# Altium PCB Motor-57.PcbDoc
Units mil, origin at the board's own origin, x right, y up, seen from the top; angles counter-clockwise.
Board outline 2220.47 x 2220.47 mil, 4 copper layers (Top1, Signal2, Gnd3, Bottom4), stack 30.634 mil thick; 67 components, 62 nets, 255 pads, 285 vias.
Unrouted connection lines stored in the file: 54.
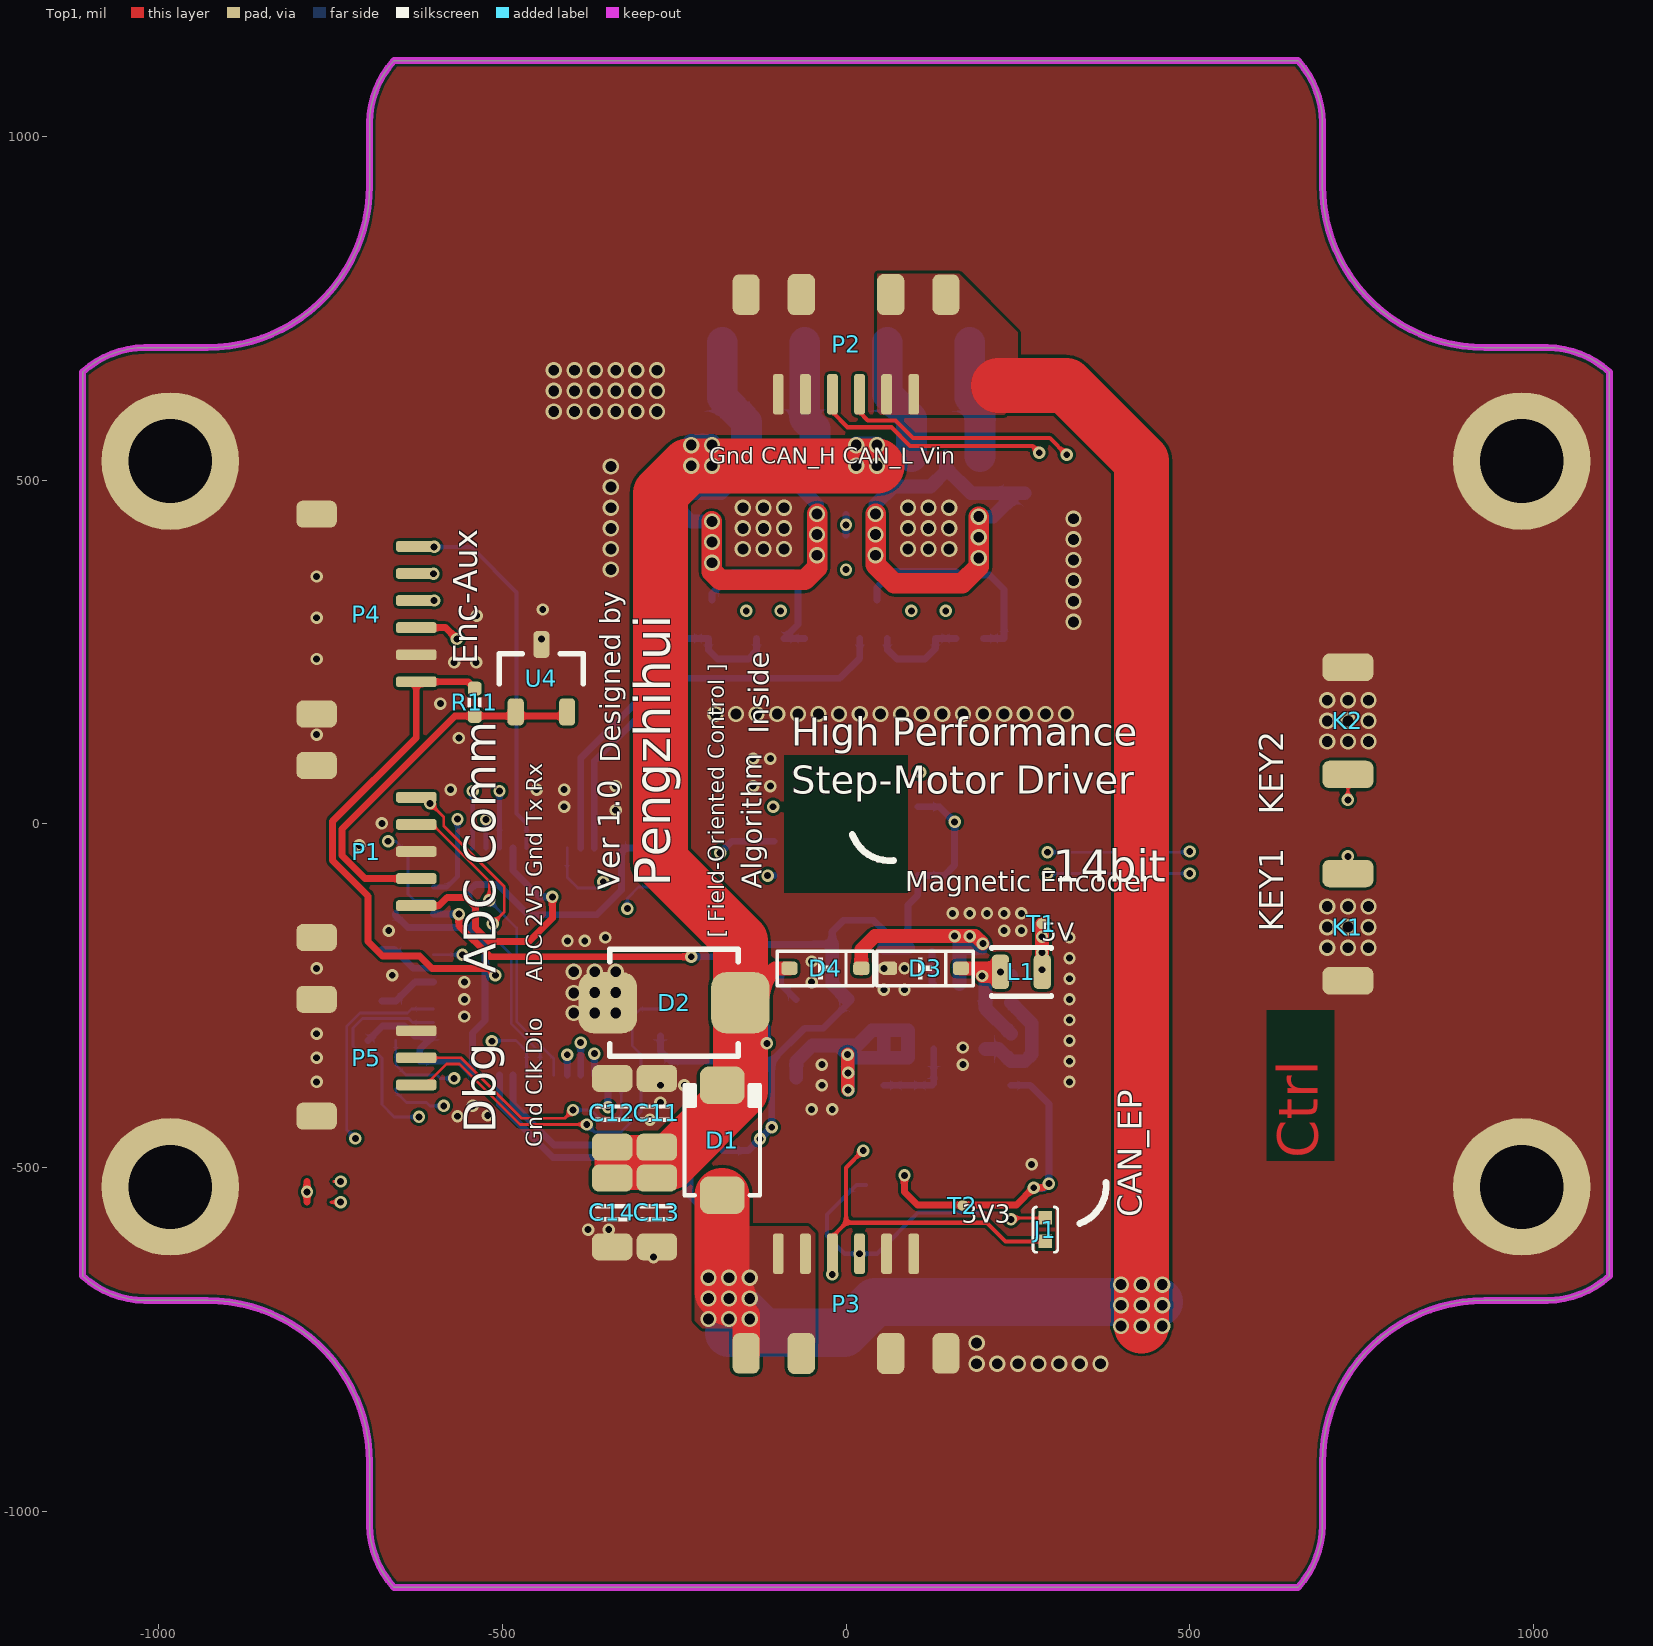
[diagram p0: Top1 view]
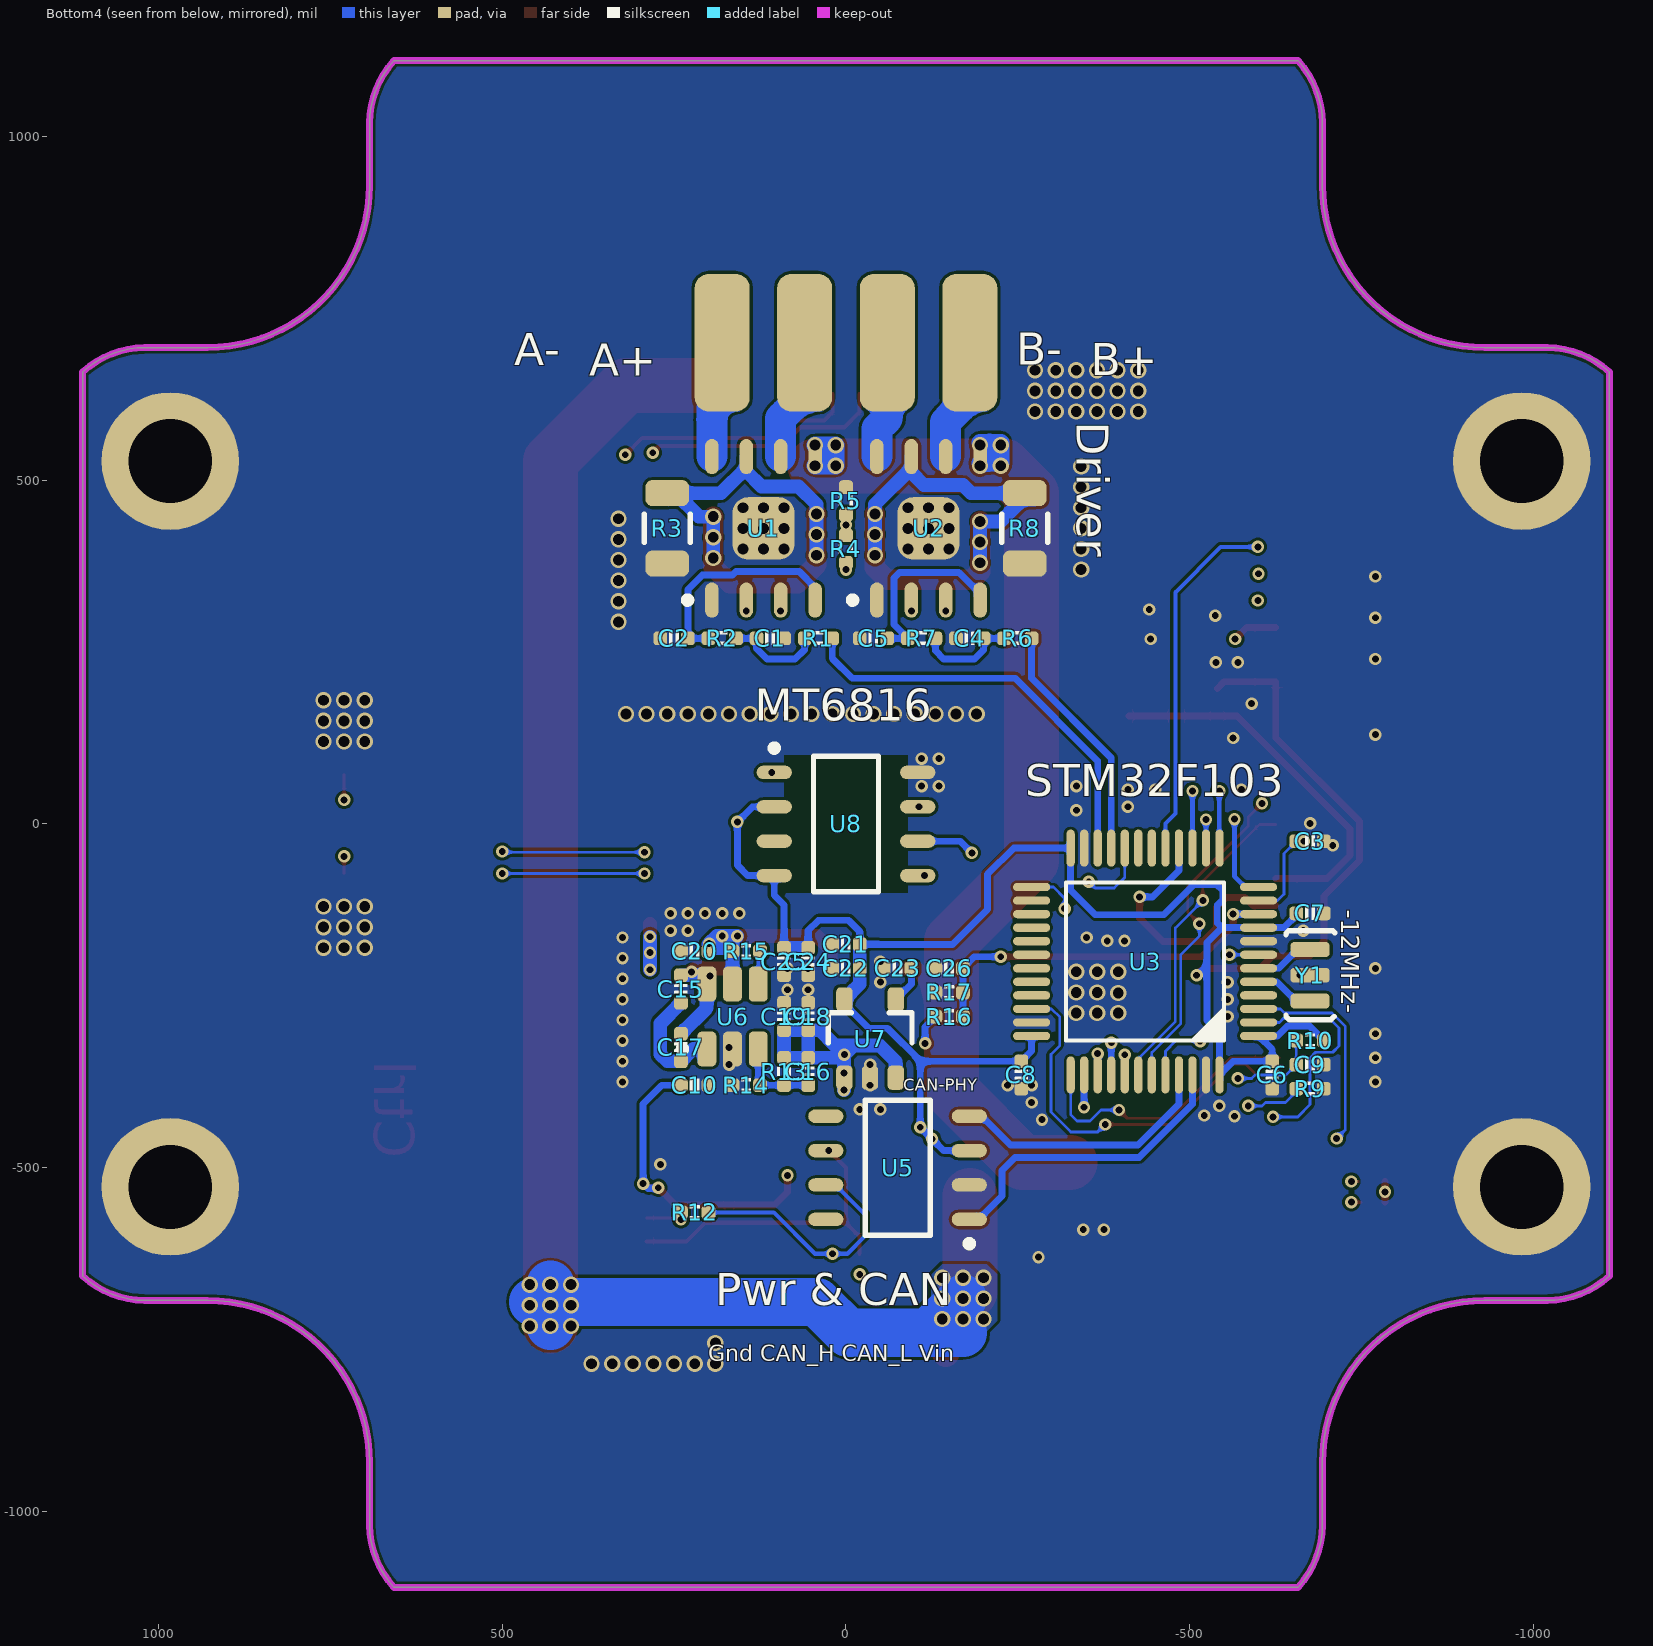
[diagram p1: Bottom4 view, seen from below]
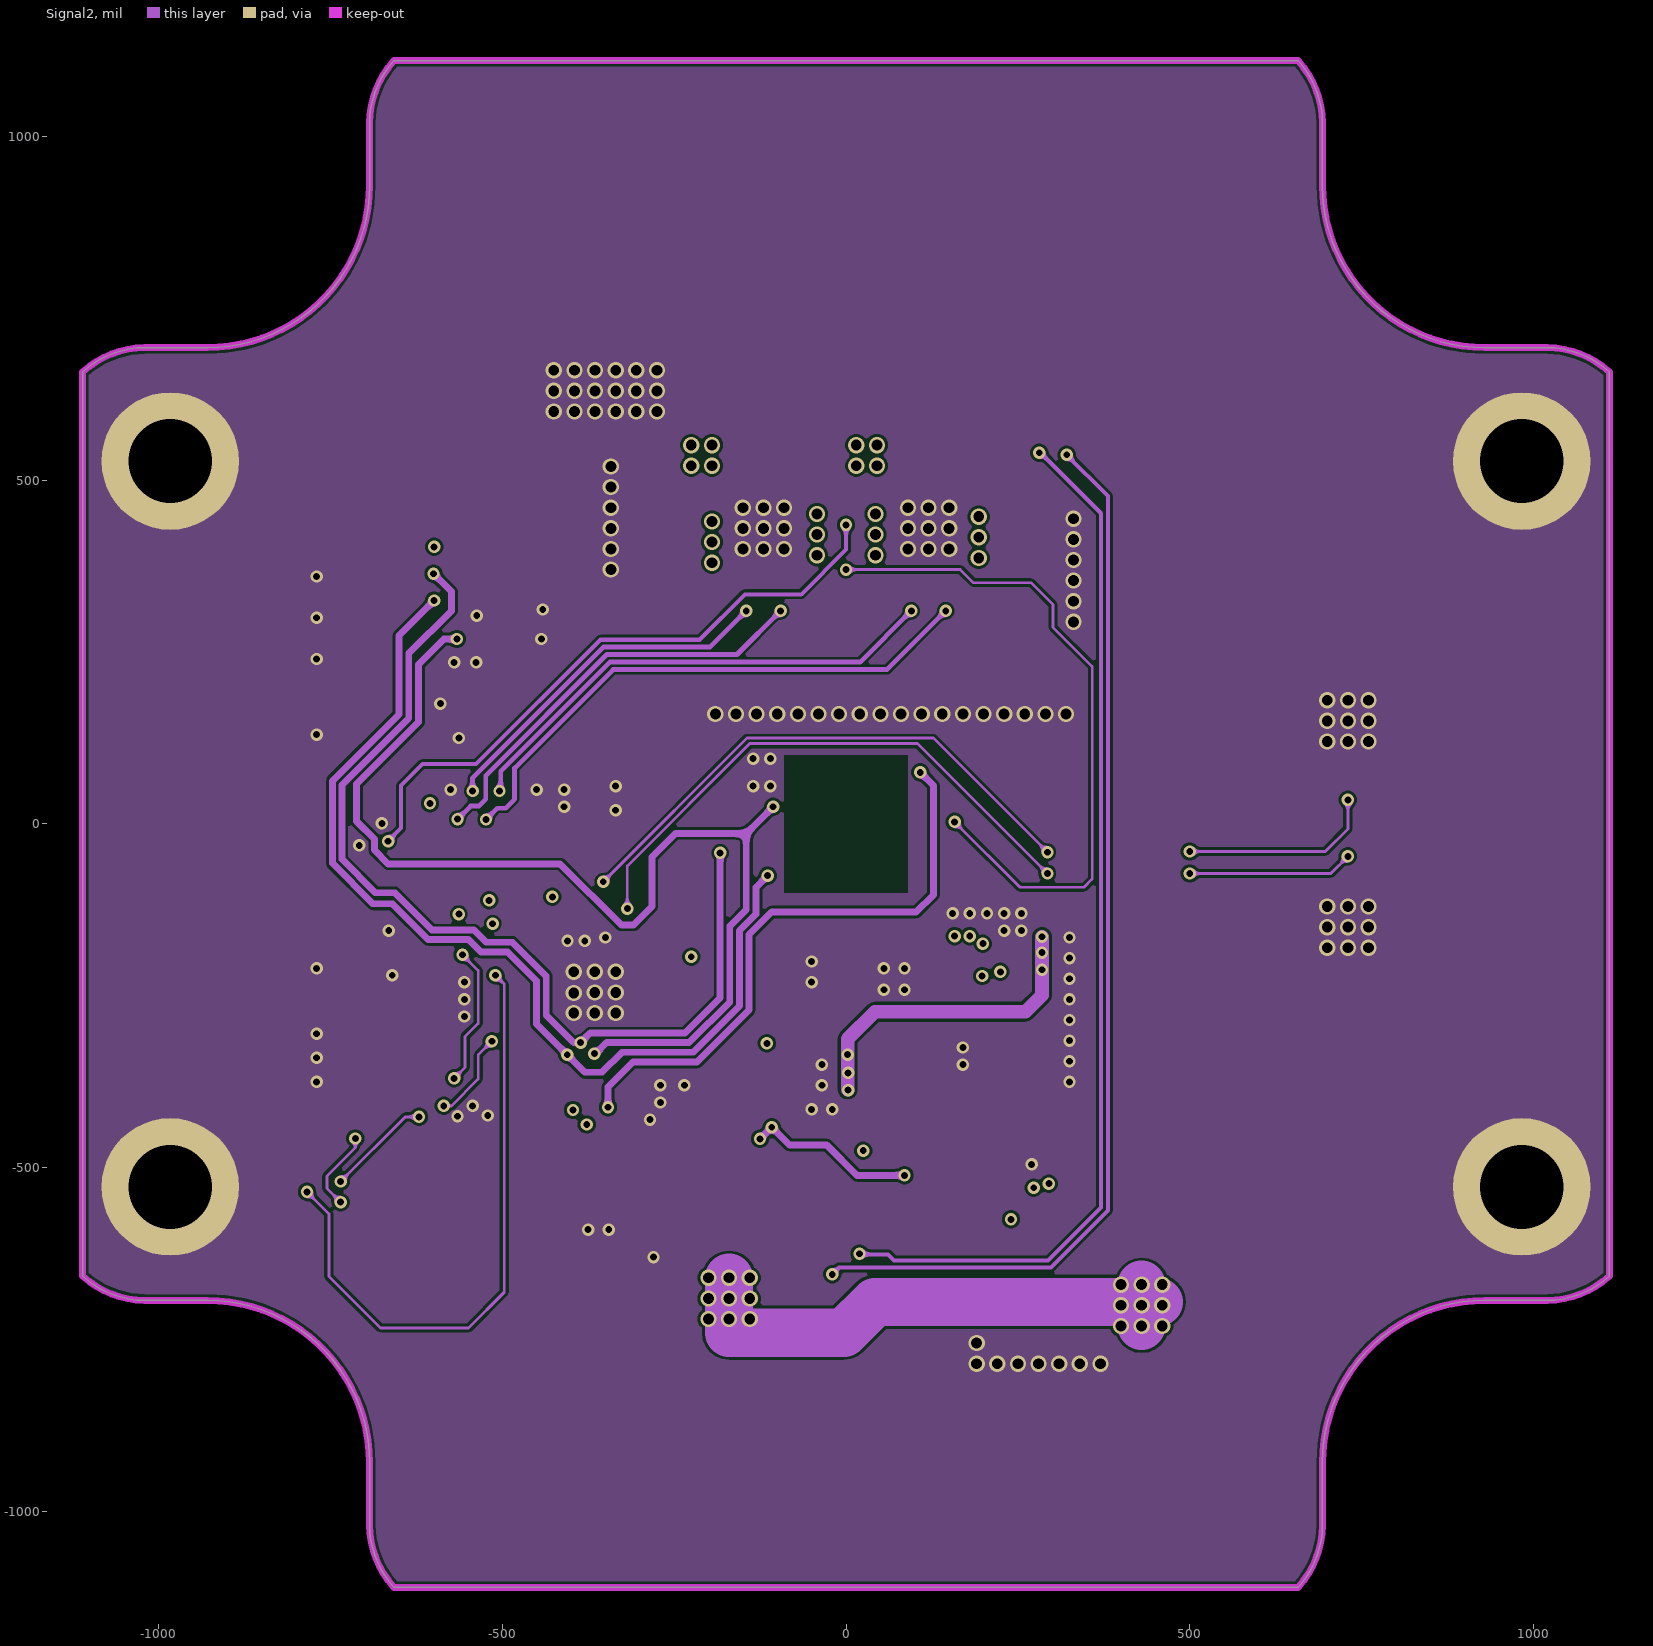
[diagram p2: Signal2]
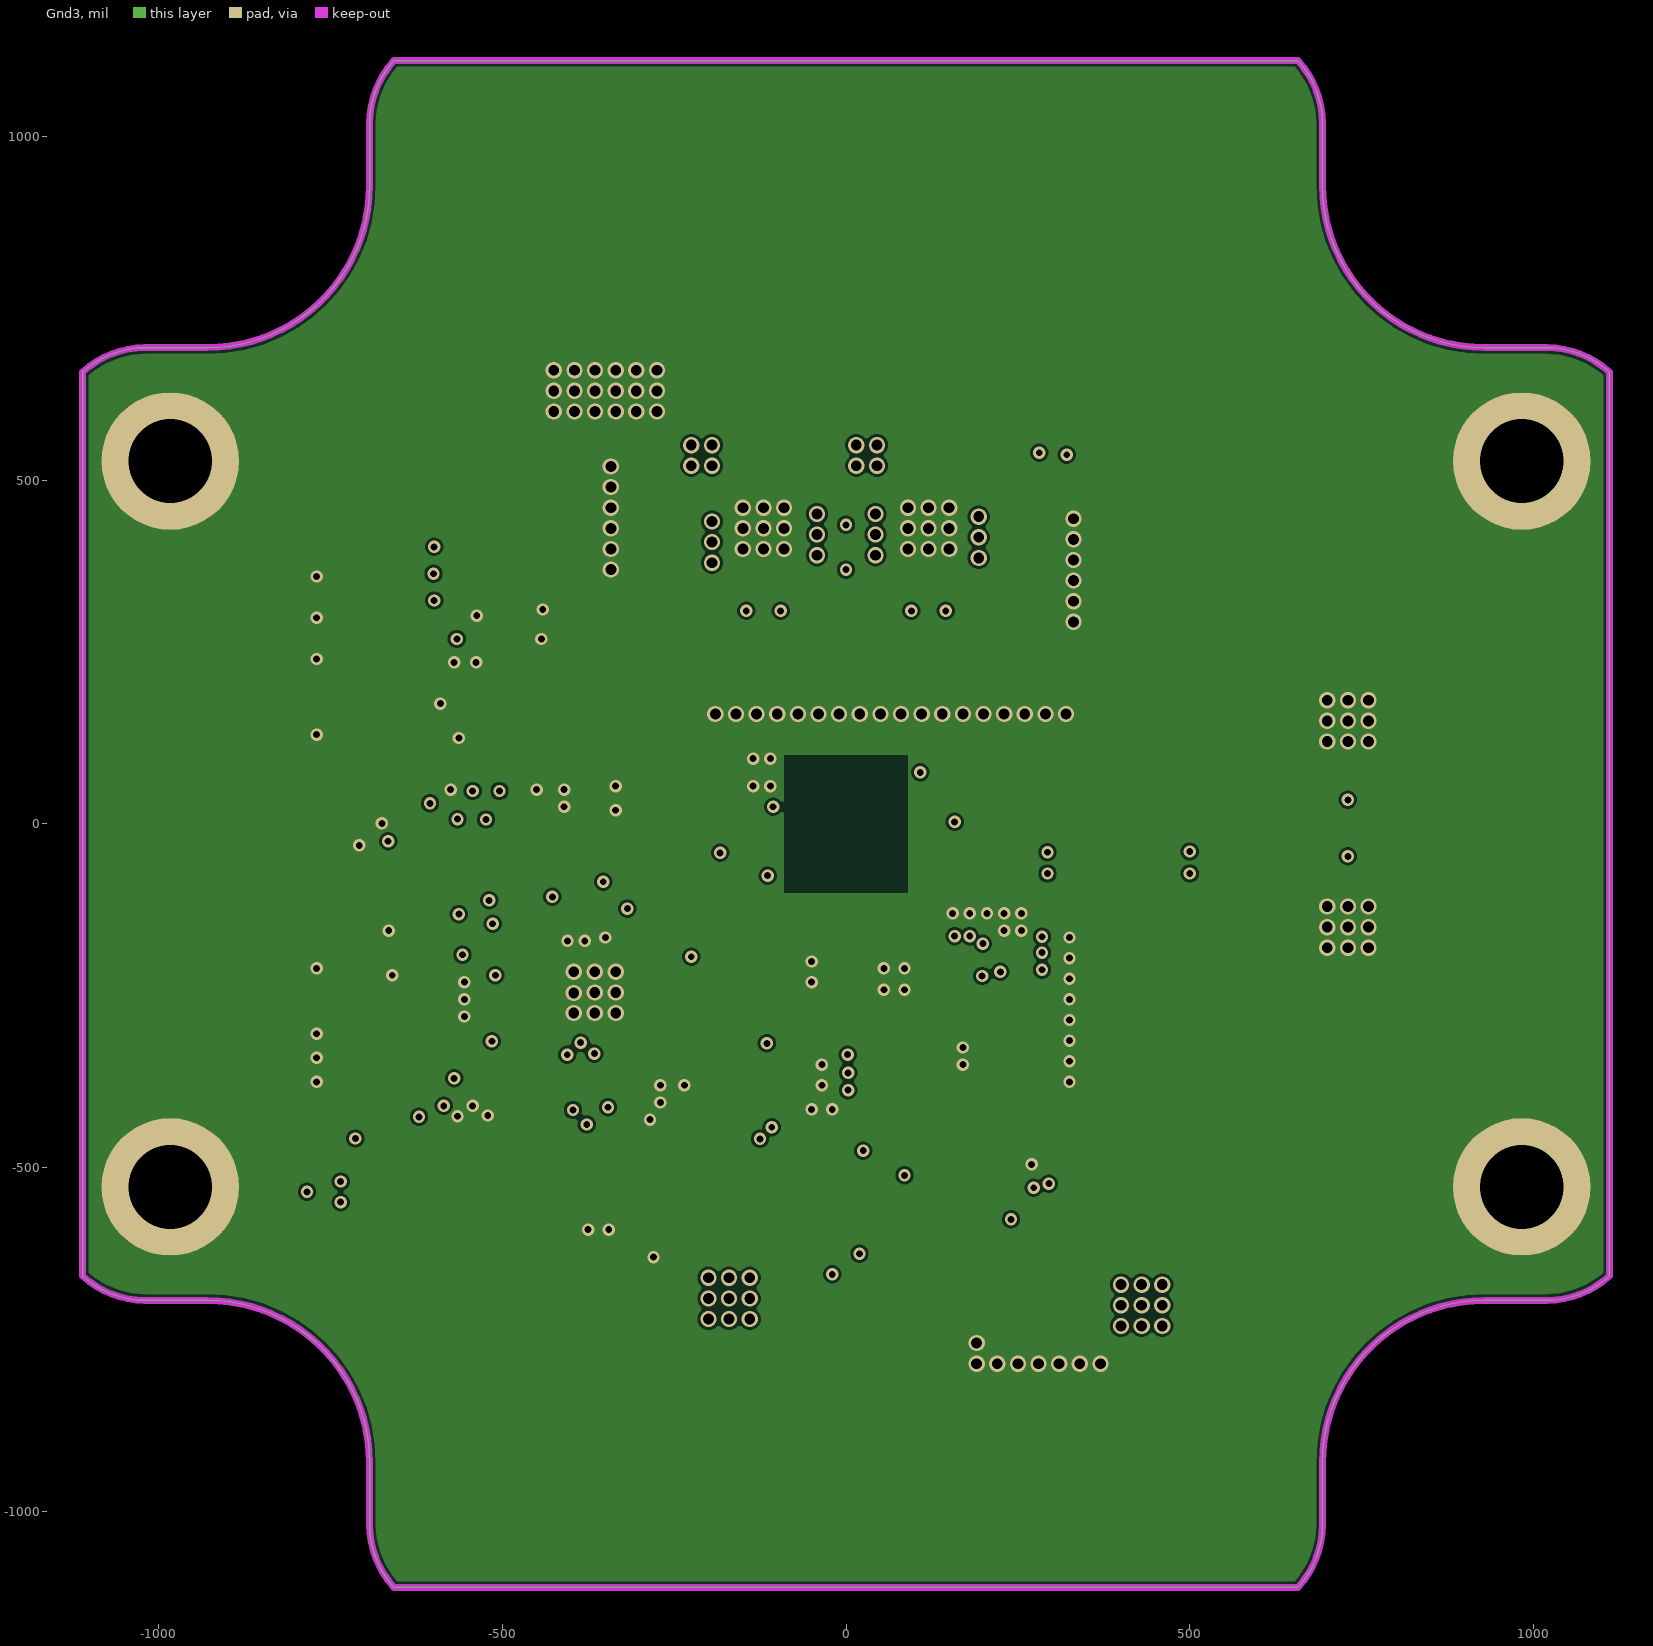
[diagram p3: Gnd3]
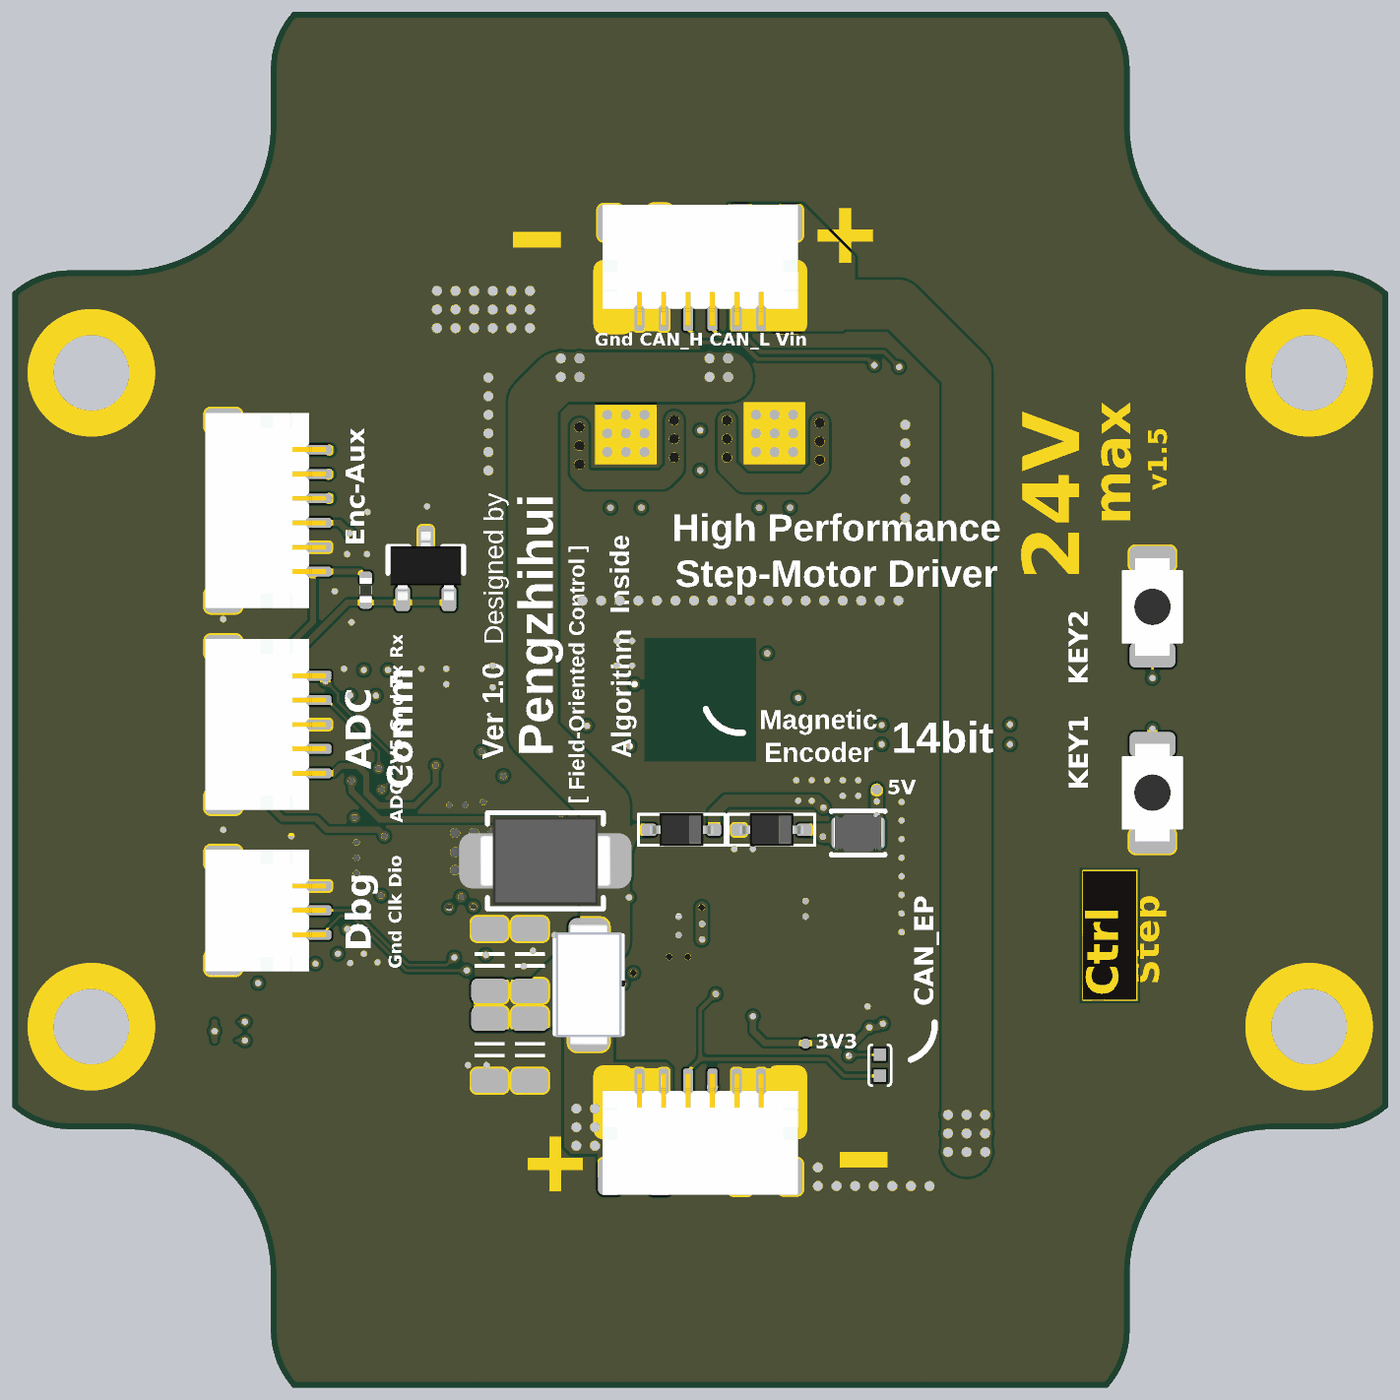
[diagram p4: 3D render of the assembled board from above, using the file's embedded part models]
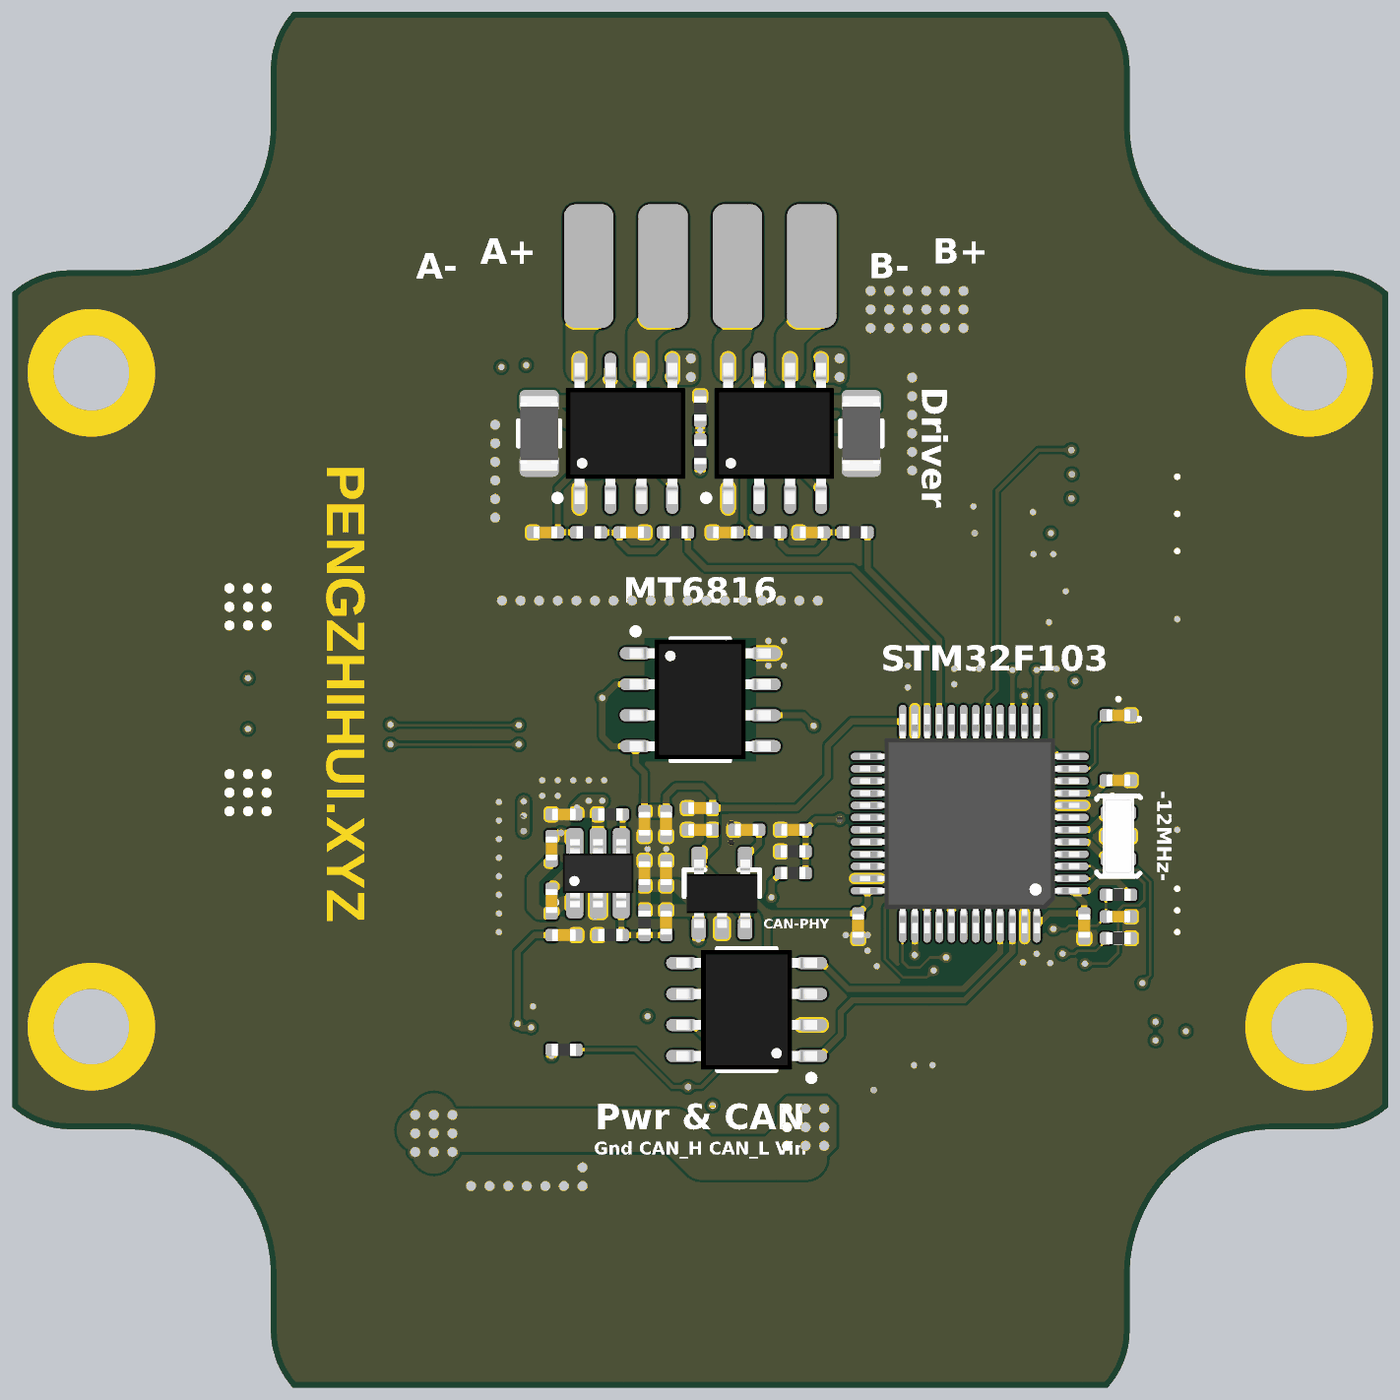
[diagram p5: 3D render of the assembled board from below, using the file's embedded part models]

## Layer stack, top to bottom
Top Solder: solder mask 0.4, Solder Resist, Dk 3.5
Top1: signal copper 1.4
Dielectric1: core 10, FR-4, Dk 4.2
Signal2: signal copper 1.417
Dielectric2: core 10, Dk 4.2
Gnd3: signal copper 1.417
Dielectric3: prepreg 5, Dk 4.2
Bottom4: signal copper 1.4
Bottom Solder: solder mask 0.4, Solder Resist, Dk 3.5

## Board outline
-1019.97,-693 -928.63,-693 cw(c-928.63,-928.63) -693,-928.63 -693,-1019.97 ccw(c-556,-1018.18) -657.48,-1110.24 657.48,-1110.24 ccw(c556.01,-1018.18) 693,-1019.97 693,-928.63 cw(c928.63,-928.63) 928.63,-693 1019.97,-693 ccw(c1018.18,-556) 1110.24,-657.48 1110.24,657.48 ccw(c1018.18,556.01) 1019.97,693 928.63,693 cw(c928.63,928.63) 693,928.63 693,1019.97 ccw(c556.01,1018.18) 657.48,1110.24 -657.48,1110.24 ccw(c-556.01,1018.18) -693,1019.97 -693,928.63 cw(c-928.63,928.63) -928.63,693 -1019.97,693 ccw(c-1018.18,556) -1110.24,657.48 -1110.24,-657.48 ccw(c-1018.18,-556)

## Design rules (kind name [scope] priority, off if disabled: settings)
Clearance [All] p1: gap=4 ignorepadtopadclearanceinfootprint=FALSE except(0: Arc-Hole Track-Hole SMDPad-Hole THPad-Hole Via-Hole Fill-Hole Poly-Hole Region-Hole Text-Hole)
ComponentClearance [All] p1: gap=0 collisioncheckmode=3 verticalgap=0 showdistances=FALSE
DiffPairsRouting [All] p1: maxlimit=9 minlimit=9 mostfreqgap=9 toplayer_minwidth=15 toplayer_maxwidth=15 toplayer_prefwidth=15 midlayer1_minwidth=15 midlayer1_maxwidth=15 midlayer1_prefwidth=15 midlayer2_minwidth=15 midlayer2_maxwidth=15 midlayer2_prefwidth=15 bottomlayer_minwidth=15 bottomlayer_maxwidth=15 bottomlayer_prefwidth=15 maxuncoupledlength=500
FanoutControl Fanout_BGA [All] p1: bgadir=Out bgaviamode=Centered fanoutstyle=Auto fanoutdirection=Alternating viagrid=1 // Fanout_BGA (Default Rule)
HoleSize [All] p1: absolutevalues=TRUE maxlimit=10000 minlimit=8 maxpercent=80.000 minpercent=20.000
MinimumSolderMaskSliver [All] p1 off: minsoldermaskwidth=2
PlaneClearance [All] p1: clearance=8
PlaneConnect [All] p1: planeconnectstyle=Direct reliefexpansion=20 reliefentries=4 reliefconductorwidth=10 reliefairgap=10
PolygonConnect [All] p1: connectstyle=Direct reliefconductorwidth=10 reliefentries=4 polygonreliefangle="90 Angle" airgapwidth=10
RoutingVias [All] p1: holewidth=8 width=16 viastyle="Through Hole" minholewidth=6 minwidth=12 maxholewidth=28 maxwidth=50
SilkToSilkClearance [All] p1: silktosilkclearance=0
SilkToSolderMaskClearance [IsPad] p1: minsilkscreentomaskgap=0 clearancetoexposedcopper=TRUE
SolderMaskExpansion [All] p1: expansion=3 istentingtop=FALSE
Width GND [(InNet('AGND') OR InNet('GND'))] p1: maxlimit=50 minlimit=4 preferedwidth=10
Width VCC [(InNet('VDD_SYS_3.3V') OR InNet('VDD_AV_3.3V') OR InNet('VDD_5V') OR InNet('VDD1V2-SYS') OR InNet('VDD1V1-EPHY') OR InNet('VDD-CPUX') OR InNet('VDD-CPUS') OR InNet('VDD-CPUFB') OR InNet('VCC-DRAM'))] p2: maxlimit=50 minlimit=4 preferedwidth=10
Width [All] p3: maxlimit=10000 minlimit=4 preferedwidth=4
21 further rules are at their usual default settings.

## Classes and differential pairs
component class Port: C10 J1 K1 K2 P1 P2 P3 P4 P5 U4 U5
component class MCU: C6 C7 C8 C9 R9 R10 U3 Y1
component class Interface: C24 C25 C26 R16 R17 U8
component class Drive: C1 C2 C3 C4 C5 R1 R2 R3 R4 R5 R6 R7 R8 U1 U2
component class Power: C11 C12 C13 C14 C15 C16 C17 C18 C19 C20 C21 C22 C23 D1 D2 D3 D4 L1 R13 R15 T1 T2 U6 U7

## Components (designator, comment, footprint, x,y, rotation, side; value= is the part's Value field where it differs from the comment)
C1 "0.1uF" CAP_0402 110,270 r0 bottom value=0.1u
C2 "0.1uF" CAP_0402 250,270 r180 bottom value=0.1u
C3 "10uF" CAP_0402 -675,-25 r0 bottom value=0.1u
C4 "0.1uF" CAP_0402 -180,270 r180 bottom value=0.1u
C5 "0.1uF" CAP_0402 -40,270 r180 bottom value=0.1u
C6 "0.1uF" CAP_0402 -620,-365 r90 bottom value=0.1u
C7 "0.1uF" CAP_0402 -675,-130 r0 bottom value=0.1u
C8 "0.1uF" CAP_0402 -255,-365 r90 bottom value=0.1u
C9 "0.1uF" CAP_0402 -675,-350 r0 bottom value=0.1u
C10 "10uF" CAP_0402 220,-380 r0 bottom value=0.1u
C11 "100uF" 1206-CAP -275,-420 r270 top value=0.1u
C12 "100uF" 1206-CAP -340,-420 r270 top value=0.1u
C13 "100uF" 1206-CAP -275,-565 r90 top value=0.1u
C14 "100uF" 1206-CAP -340,-565 r90 top value=0.1u
C15 "0.1uF" CAP_0402 240,-240 r270 bottom value=0.1u
C16 "100pF" CAP_0402 55,-360 r270 bottom value=0.1u
C17 "0.1uF" CAP_0402 240,-325 r270 bottom value=0.1u
C18 "0.1uF" CAP_0402 55,-280 r270 bottom value=0.1u
C19 "10uF" CAP_0402 90,-280 r270 bottom value=0.1u
C20 "10uF/50V" CAP_0402 220,-185 r180 bottom value=0.1u
C21 "0.1uF" CAP_0402 0,-175 r180 bottom value=0.1u
C22 "10uF" CAP_0402 0,-210 r180 bottom value=0.1u
C23 "10nF" CAP_0402 -75,-210 r180 bottom value=0.1u
C24 "10uF" CAP_0402 55,-200 r90 bottom value=0.1u
C25 "0.1uF" CAP_0402 90,-200 r90 bottom value=0.1u
C26 "0.1uF" CAP_0402 -150,-210 r180 bottom value=0.1u
D1 "SS54" DO-214AC -180,-460 r90 top
D2 "SMBJ28CA" SMBJ-CA_MFG -250,-260 r0 top
D3 "二极管-5819W" SOD-323 115,-210 r0 top
D4 "二极管-5819W" SOD-323 -30,-210 r0 top
J1 "跳线" 0402-0R 290,-590 r270 top
K1 "TACT 2P" ButtonTACT_3x4x2_180 730,-150 r90 top value=3x4
K2 "TACT 2P" ButtonTACT_3x4x2_180 730,150 r270 top value=3x4
L1 "6.8uH" IND-201612 255,-215 r0 top
P1 "SH1.0-5P" SH1.0-5P -625,-40 r270 top
P2 "SH1.0-6P" SH1.0-6P 0,625 r180 top
P3 "SH1.0-6P" SH1.0-6P 0,-625 r0 top
P4 "SH1.0-6P" SH1.0-6P -625,305.32 r270 top
P5 "SH1.0-3P" SH1.0-3P -625,-340 r270 top
R1 "1K" RES_0402 40,270 r0 bottom value=22R
R2 "1K" RES_0402 180,270 r0 bottom value=22R
R3 "0.1R" 1206-RES 260,430 r270 bottom value=22R
R4 "NCP15XH103F03RC" RES_0402 0,400 r270 bottom value=10k
R5 "3.3K" RES_0402 0,470 r270 bottom value=22R
R6 "1K" RES_0402 -250,270 r0 bottom value=22R
R7 "1K" RES_0402 -110,270 r0 bottom value=22R
R8 "0.1R" 1206-RES -260,430 r270 bottom value=22R
R9 "10K" RES_0402 -675,-385 r180 bottom value=22R
R10 "10K" RES_0402 -675,-315 r180 bottom value=22R
R11 "120R" RES_0402 -540,177 r270 top value=22R
R12 "120R" RES_0402 220,-565 r0 bottom value=22R
R13 "10K" RES_0402 90,-360 r90 bottom value=22R
R14 "1.8K" RES_0402 145,-380 r180 bottom value=22R
R15 "1M" RES_0402 145,-185 r180 bottom value=22R
R16 "10K" RES_0402 -150,-280 r180 bottom value=22R
R17 "1K" RES_0402 -150,-245 r0 bottom value=22R
T1 "测试点" TEST_PT 285,-145 r180 top
T2 "测试点" TEST_PT 170,-554.99 r180 top
U1 "TB67H450FNG" SO-8-PAD 120,430 r90 bottom locked
U2 "TB67H450FNG" SO-8-PAD -120,430 r90 bottom locked
U3 "STM32F103CBT6" LQFP-48 -435,-200 r0 bottom locked
U4 "TL431IDBZT" SOT23-3 -443,212 r90 top
U5 "SN65HVD232D" SO-8 -75,-500 r0 bottom
U6 "ME3116" SOT23-6 165,-280 r90 bottom
U7 "LP2992 3V3" SOT23-5 -35,-310 r90 bottom
U8 "MT6816" SO-8 0,0 r180 bottom
Y1 "12MHz" 晶振-3P -675,-220 r270 bottom

## Footprints (in the part's own frame and the unit in brackets; to place one, negate y for a bottom-side part, rotate by r counter-clockwise, add the part's x,y. Pads: shape width x height; smd on the part's side, far side on the other; paste and mask are expansions set on the pad)
0402-0R [mm] "选择焊盘"
  rect 0.5x0.5 smd: 1(-0.432,0) 2(0.432,0)
  silkscreen extent -0.84,-0.46 0.84,0.46
1206-CAP [mm]
  rrect50% 1x1.5 smd: 1(-1.27,0) 2(1.27,0)
  silkscreen extent -0.3,-0.61 0.3,0.61, body extent -1.5,-0.75 1.5,0.75, height 1.5
1206-RES [mil]
  rrect50% 37.64x63.38 smd paste+0 mask+0: 1(-51.22,0) 2(51.22,0)
  silkscreen extent -21,-33 21,33, body extent -61,-31 61,31, height 26
ButtonTACT_3x4x2_180 [mil]
  rrect50% 40x74 smd: 1(-78,0) 2(78,0)
  body extent -79,-49 79,49, height 63
CAP_0402 [mil]
  rrect50% 20x20 smd: 1(-20,0) 2(20,0)
  silkscreen extent -6,-9 6,9, body extent -20,-10 20,10, height 20
DO-214AC [mil] "SMA"
  rrect50% 55x65 smd: 1(-80,0) 2(80,0)
  silkscreen extent -80,-55 80,55, body extent -98,-53 98,53, height 85
IND-201612 [mil]
  rrect50% 25x50 smd paste+0 mask+0: 1(-30.46,0) 2(30.46,0)
  silkscreen extent -43,-35 43,35, body extent -39,-31 39,32, height 37
LQFP-48 [mil]
  oval 54x12 smd: 1(-165,108.27) 2(-165,88.58) 3(-165,68.9) 4(-165,49.21) 5(-165,29.53) 6(-165,9.84) 7(-165,-9.84) 8(-165,-29.53) 9(-165,-49.21) 10(-165,-68.9) 11(-165,-88.58) 12(-165,-108.27) 25(165,-108.27) 26(165,-88.58) 27(165,-68.9) 28(165,-49.21) 29(165,-29.53) 30(165,-9.84) 31(165,9.84) 32(165,29.53) 33(165,49.21) 34(165,68.9) 35(165,88.58) 36(165,108.27)
  oval 12x54 smd: 13(-108.27,-165) 14(-88.58,-165) 15(-68.9,-165) 16(-49.21,-165) 17(-29.53,-165) 18(-9.84,-165) 19(9.84,-165) 20(29.53,-165) 21(49.21,-165) 22(68.9,-165) 23(88.58,-165) 24(108.27,-165) 37(108.27,165) 38(88.58,165) 39(68.9,165) 40(49.21,165) 41(29.53,165) 42(9.84,165) 43(-9.84,165) 44(-29.53,165) 45(-49.21,165) 46(-68.9,165) 47(-88.58,165) 48(-108.27,165)
  silkscreen extent -115,-115 115,115, body extent -177,-177 177,177, height 61
RES_0402 [mil]
  rrect50% 20x20 smd: 1(-20,0) 2(20,0)
  silkscreen extent -6,-10 6,10, body extent -20,-10 20,10, height 14
SH1.0-3P [mm]
  rrect50% 0.4x1.5 smd: 1(-1,0) 2(0,0) 3(1,0)
  rrect50% 1x1.5 smd: SH1(-2.159,-3.683) SH2(2.159,-3.683)
  body extent -2.5,-4.42 2.5,0.54, height 3.06
SH1.0-5P [mm]
  rrect50% 0.4x1.5 smd: 1(-2,0) 2(-1,0) 3(0,0) 4(1,0) 5(2,0)
  rrect50% 1x1.5 smd: SH1(-3.175,-3.683) SH2(3.175,-3.683)
  body extent -3.5,-4.42 3.5,0.54, height 3.06
SH1.0-6P [mm]
  rrect50% 0.4x1.5 smd: 1(-2.5,0) 2(-1.5,0) 3(-0.5,0) 4(0.5,0) 5(1.5,0) 6(2.5,0)
  rrect50% 1x1.5 smd: SH1(-3.691,-3.683) SH2(3.691,-3.683)
  body extent -4,-4.42 4,0.54, height 3.14
SMBJ-CA_MFG [mm]
  rrect50% 2.16x2.26 smd paste+0 mask+0: 1(-2.45,0) 2(2.45,0)
  silkscreen extent -2.37,-1.97 2.37,1.97, body extent -2.7,-1.81 2.7,1.81, height 2.62
SO-8 [mm]
  oval 1.3x0.5 smd: 1(-2.65,1.905) 2(-2.65,0.635) 3(-2.65,-0.635) 4(-2.65,-1.905) 5(2.65,-1.905) 6(2.65,-0.635) 7(2.65,0.635) 8(2.65,1.905)
  silkscreen extent -2.77,-2.5 1.2,2.93, body extent -2.89,-2.44 2.89,2.46, height 1.45
SO-8-PAD [mm]
  oval 1.3x0.5 smd: 1(-2.65,1.905) 2(-2.65,0.635) 3(-2.65,-0.635) 4(-2.65,-1.905) 5(2.65,-1.905) 6(2.65,-0.635) 7(2.65,0.635) 8(2.65,1.905)
  rrect50% 2.3x2.3 smd: 9(0,0)
  silkscreen extent -2.77,2.68 -2.53,2.93, body extent -2.89,-2.44 2.89,2.46, height 1.45
SOD-323 [mm]
  rrect50% 0.6x0.5 smd: 1(-1.329,0) 2(1.329,0)
  silkscreen extent -1.78,-0.64 1.78,0.64, body extent -1.3,-0.68 1.3,0.67, height 1.15
SOT23-3 [mm] "SOT23, 3-Leads, Body 3.1x3.0mm (max), Pitch 0.95mm, IPC Medium Density"
  rrect50% 1x0.6 smd: 1(-1.246,0.95) 2(-1.246,-0.95) 3(1.246,0)
  silkscreen extent -0.2,-1.55 0.9,1.55, body extent -1.3,-1.45 1.5,1.45, height 1.2
SOT23-5 [mm] "SOT23, 3-Leads, Body 3.1x3.0mm (max), Pitch 0.95mm, IPC Medium Density"
  rrect50% 0.889x0.6 smd: 1(-1.5,0.95) 2(-1.5,0) 3(-1.5,-0.95) 4(1.396,-0.95) 5(1.396,0.95)
  silkscreen extent -0.2,-1.55 0.9,1.55, body extent -1.48,-1.45 1.32,1.45, height 1.2
SOT23-6 [mm]
  rrect50% 1.3x0.7 smd: 1(-1.2,0.95) 2(-1.2,0) 3(-1.2,-0.95) 4(1.2,-0.95) 5(1.2,0) 6(1.2,0.95)
  silkscreen extent -1.32,1.73 -1.08,1.98, body extent -1.4,-1.45 1.4,1.45, height 1.45
TEST_PT [mil]
  rrect100% 16x16 smd: 0(0,0.01)
晶振-3P [mm] "贴片晶振"
  rrect50% 0.55x1.45 smd: 1(-0.95,0) 2(0,0) 3(0.95,0)
  silkscreen extent -1.65,-0.89 1.65,0.91, body extent -1.6,-0.89 1.65,0.89, height 0.7

## Part data
C1 C2 C3 C4 C5 C6 C7 C8 C9 C10 C15 C16 C17 C18 C19 C20 C21 C22 C23 C24 C25 C26: library part 电容-0402, "Capacitor"
C11 C12 C13 C14: library part 电容-1206, "Capacitor"
D1: library part Diode_SMA, "Diode", Type=SMA
D3 D4: "40V"
J1: "Resistor", LatestRevisionDate=17-Jul-2002, LatestRevisionNote="Re-released for DXP Platform.", PackageDescription="Axial Device, Thru-Hole; 2 Leads; 0.4 in Pin Spacing", PackageReference=AXIAL-0.4, Published=8-Jun-2000, Publisher="Altium Limited"
K1 K2: library part ButtonTACT_3x4x2_180, "Button", Type="TACT 2P"
L1: library part 电感-201612
P5: "Header"
R1 R2 R5 R6 R7 R9 R10 R11 R12 R13 R14 R15 R16 R17: library part 电阻-0402, "Resistor"
R3 R8: library part 电阻-1206, "Resistor"
R4: "THERMISTOR 10K OHM NTC 0402 SMD"
U1 U2: "PWM Chopper Type DC Brushed Motor Driver"
U3: "ARM Cortex-M3 32-bit MCU, 128 KB Flash, 20 KB Internal RAM, 37 I/Os, 48-pin LQFP, -40 to 85 degC, Tray", I/Os (High Current)=37, Operating Frequency(F) (Processor speed) (MHz)=72, Supplier Part Number 1=497-6288-ND, Supply Voltage(Vcc) min (V)=2, A/D Converter="2x12-bit (10 Channel)", ComponentLink1Description="Manufacturer URL", ComponentLink1URL=http://www.st.com/web/en/home.html, ComponentLink2Description=Datasheet, ComponentLink2URL=http://www.st.com/st-web-ui/static/active/en/resource/technical/document/datasheet/CD00161566.pdf, ComponentLink3Description="Package Specification", ComponentLink3URL=http://www.st.com/st-web-ui/static/active/en/resource/technical/document/datasheet/DM00058181.pdf, Core="ARM Cortex-M3", DatasheetVersion="Rev. 16", FLASH Size (Prog) (kB)=128, Internal RAM Size (kB)=20, Mounting Technology="Surface Mount", PackageDescription="48-Pin Low Profile Quad Flat Package, 7 x 7 mm Body, 0.5 mm Pitch", PackageReference=LQFP48, PackageVersion="Rev. 6, 06/2013", Packing=Tray, PartNumber=STM32F103CBT6, Supplier 1=Digi-Key, Supplier 2=Farnell, Supplier 3=Newark, Supplier 4=Newark, Supplier 5=Mouser, Supplier Part Number 2=1606327, Supplier Part Number 3=11N8296, Supplier Part Number 4=57P1214, Supplier Part Number 5=511-STM32F103CBT6
U4: "Adjustable precision shunt regulator 3-SOT-23 -40 to 85", Package="SOT-23-3 Texas Instruments", Availability=Warning, Check_prices=https://www.snapeda.com/parts/TL431IDBZT/Texas%20Instruments/view-part/1206577/?ref=eda, MF="Texas Instruments", MP=TL431IDBZT, Price=None, Purchase-URL=https://pricing.snapeda.com/search/part/TL431IDBZT/?ref=eda, SnapEDA_Link=https://www.snapeda.com/parts/TL431IDBZT/Texas%20Instruments/view-part/1206577/?ref=snap
U5: Manufacturer="Texas Instruments", Manufacturer Part Number=SN65HVD232DR, Operating Temperature="-40°C ~ 85°C", Package / Case="8-SOIC (0.154\", 3.90mm Width)", Supplier Device Package=8-SOIC, Supplier Part Number 1=296-26344-2-ND, Voltage - Supply="3 V ~ 3.6 V", Category="Integrated Circuits (ICs)", ComponentLink1Description=http://www.ti.com/lit/ds/symlink/sn65hvd230.pdf, ComponentLink1URL=http://www.ti.com/lit/ds/symlink/sn65hvd230.pdf, Data Rate=1Mbps, Duplex=Half, Mounting Type="Surface Mount", Number of Drivers/Receivers=1/1, Packaging="Tape & Reel (TR)", Part Status=Active, Pricing 1="2500=0.84375 (USD)", Pricing 2="1=2.05, 10=1.842, 100=1.4809, 500=1.21668, 1000=1.00811 (USD)", Protocol=CAN, RoHS="RoHS Compliant", Stock=5000, Supplier 1=Digi-Key, Supplier 2=Digi-Key, Supplier Part Number 2=296-26344-1-ND, Type=Transceiver
U6: "DC-DC"
U7: library part LP2992, "LDO"
U8: "Magnetic Position Sensor"
Y1: library part 晶振-3Pin, "村田贴片"

## Free pads (board coordinates)
  round 200 hole 122.05: ""(-982.87,-527.76) ""(-982.87,527.76) ""(982.87,-527.76) ""(982.87,527.76)
  rrect50% 80x200 smd far side: ""(-180,700) ""(-60,700) ""(60,700) ""(180,700)
  rrect50% 65x120 on Top Solder: ""(-140,650) ""(-140,-650) ""(140,650) ""(140,-650)
  rrect50% 40x60 smd: ""(-65,770) ""(-65,-770) ""(65,770) ""(65,-770)

## Via types
v1: diameter 18, hole 10, Top1 to Bottom4, tented both sides, 146 vias
v2: diameter 23.62, hole 15.75, Top1 to Bottom4, tented both sides, 139 vias

## Nets (pads, with @x,y where several pads share a name; then routed paths per layer and width w, separated by ;. In a path a pad name is that pad's centre, name@x,y a point inside that pad or via, vN(x,y) a via of type N, cw(c..) or ccw(c..) an arc to the next point about the centre after c; other vN are vias at no path point)
ADC_ENC: P1.5 U3.16 | length 397.9
  Top1 w10: P1.5 -591.74,-118.74 -580,-107 -553,-107 -539,-121 -539,-151 -519,-171 -461,-171 -427,-137 v1(-427,-106)
  Bottom4 w10: U3.16 -484.21,-67.79 -446,-106 v1(-427,-106)
BUTTON_1: K1.2 U3.25 | length 1367.1
  Top1 w4: K1.2 v1(730,-47)
  Signal2 w4: v1(-318,-123) -318,-61 -140,117 104,117 v1(293,-72) ; v1(500,-72) 705,-72 v1(730,-47)
  Bottom4 w4: v1(-318,-123) -318,-108 -301.73,-91.73 U3.25 ; v1(293,-72) v1(500,-72)
BUTTON_2: K2.2 U3.20 | length 1435.1
  Top1 w4: v1(730,35) K2.2
  Signal2 w4: v1(-353,-84) -144,125 127,125 v1(293,-41) ; v1(500,-40) 697,-40 730,-7 v1(730,35)
  Bottom4 w4: U3.20 -405.47,-77.53 -390,-93 -362,-93 v1(-353,-84) ; v1(293,-41) v1@499,-41
CAN_H: P2.4 P3.4 R12.1 U5.7 | length 2243
  Top1 w6: P2.4 -19.69,598.97 2.28,577 66,577 93,550 271,550 v1(281,540)
  Signal2 w6: v1@20.69,-626 61,-626 70,-635 293.86,-635 371,-557.86 371,452 283,540 v1(281,540)
  Bottom4 w6: U5.7 15,-525 -27.76,-567.76 -27.76,-599.15 -1.91,-625 v1(19.69,-625) 45,-625 105,-565 R12.1
CAN_L: J1.2 P2.3 P3.3 U5.6 | length 2390.4
  Top1 w6: P3.3 -19.68,-599.68 0,-580 ; P2.3 19.69,598.97 31.65,587 72,587 97.41,561.59 296.41,561.59 v1(321,537) ; v1(25,-475) 0,-500 0,-580 ; J1.2 232,-607 205,-580 0,-580
  Signal2 w6: v1(-20,-655) -10,-645 298,-645 381,-562 381,477 v1(321,537)
  Bottom4 w6: v1(25,-475) U5.6
CAN_RX: U3.45 U5.4 | length 389.4
  Bottom4 w10: U3.45 -484.21,-407.43 -424.64,-467 -239,-467 -197,-425 U5.4
CAN_TX: U3.46 U5.1 | length 458.1
  Bottom4 w10: U3.46 -503.9,-407.55 -426.44,-485 -246,-485 -227,-504 -227,-541 -193,-575 U5.1
GND: C1.1 C2.1 C3.1 C4.1 C5.1 C6.1 C7.1 C8.1 C9.1 C10.1 C11.1 C12.1 C13.1 C14.1 C18.1 C19.1 C20.1 C21.1 C22.1 C23.1 C24.1 C25.1 C26.1 D2.1 D3.1 K1.1 K2.1 P1.3 P1.SH1 P1.SH2 P2.5 P2.6 P2.SH2 P3.5 P3.6 P3.SH2 P4.5 P4.SH1 P4.SH2 P5.1 P5.SH1 P5.SH2 pad.@65,-770 pad.@982.87,527.76 pad.@982.87,-527.76 pad.@-65,770 pad.@-982.87,527.76 pad.@-982.87,-527.76 R3.2 R5.1 R8.2 R9.2 R14.1 R17.2 U1.1 U1.9 U2.1 U2.9 U3.8 U3.23 U3.35 U3.47 U4.3 U5.2 U6.2 U7.2 U8.8 Y1.2
  other v1: -280,-630 -375,-590 -345,-590 270,-495 -285,-430 -565,-425 -521,-424 -50,-415 -20,-415 -543,-410 -270,-405 -270,-380 -235,-380 -35,-380 -770,-375 325,-375 -35,-350 170,-350 325,-345 -770,-340 170,-325 325,-315 -770,-305 325,-285 -555,-280 -555,-255 325,-255 55,-241 85,-241 -555,-230 -50,-230 325,-225 -660,-220 -770,-210 55,-210 85,-210 -50,-200 325,-195 -405,-170 -380,-170 -350,-165 325,-165 -665,-155 230,-155 255,-155 155,-130 180,-130 205,-130 230,-130 255,-130 -708,-31 -675,1 -335,20 -410,25 -575,50 -450,50 -410,50 -335,55 -135,55 -110,55 -135,95 -110,95 -563,125 -770,130 -590,175 -570,235 -538,235 -770,240 -443,269 -770,300 -537,303 -441,312 -770,360
  other v2: 190,-785 220,-785 250,-785 280,-785 310,-785 340,-785 370,-785 190,-755 -395.92,-275 -365.46,-275 -335,-275 -395.92,-245.66 -365.46,-245 -335,-245 -395.92,-215 -365.46,-215 -335,-215 700,-180 730,-180 760,-180 700,-150 730,-150 760,-150 700,-120 730,-120 760,-120 700,120 730,120 760,120 700,150 730,150 760,150 -190,160 -160,160 -130,160 -100,160 -70,160 -40,160 -10,160 20,160 50,160 80,160 110,160 140,160 170,160 200,160 230,160 260,160 290,160 320,160 700,180 730,180 760,180 331,294 331,324 331,354 -342,370 331,384 -342,400 -150,400 -120,400 -90,400 90,400 120,400 150,400 331,414 -342,430 -150,430 -120,430 -90,430 90,430 120,430 150,430 331,444 -342,460 -150,460 -120,460 -90,460 90,460 120,460 150,460 -342,490 -342,520 -425,600 -395,600 -365,600 -335,600 -305,600 -275,600 -425,630 -395,630 -365,630 -335,630 -305,630 -275,630 -425,660 -395,660 -365,660 -335,660 -305,660 -275,660
IN_AM: U1.2 U3.14 | length 862.4
  Signal2 w7: v1(-523.58,6.58) -507.16,23 -495,23 -482,36 -482,81.33 -338.83,224.5 59.5,224.5 v1(145,310)
  Bottom4 w7: U3.14 v1(-523.58,6.58)
IN_AP: U1.3 U3.15 | length 806.3
  Signal2 w7: v1(-504,48) -502.27,49.73 -502.27,76.62 -343.39,235.5 20.5,235.5 v1(95,310)
  Bottom4 w7: v1(-504,48) -503.9,47.9 U3.15
IN_BM: U2.2 U3.12 | length 740.2
  Signal2 w7: v1(-565,7) -546,26 -534,26 -524,36 -524,70.44 -347.94,246.5 -158.5,246.5 v1(-95,310)
  Bottom4 w7: U3.12 -580.73,-91.73 -565,-76 v1(-565,7)
IN_BP: U2.3 U3.13 | length 601
  Signal2 w7: v1(-543,48) -543.27,48.27 -543.27,66.73 -352.5,257.5 -197.5,257.5 v1(-145,310)
  Bottom4 w7: U3.13 -543,-34.73 v1(-543,48)
IN_PWM_A: R1.1 U3.22 | length 603.8
  Bottom4 w10: U3.22 -366.1,91.9 -246,212 -9,212 20,241 R1.1
IN_PWM_B: R6.1 U3.21 | length 353
  Bottom4 w10: U3.21 -385.79,96.21 -270,212 R6.1
MT6816_AUX_CS: P4.1 U3.17 | length 525.3
  Bottom4 w6: v1(-599,403) -545,403 -479,337 -479,15 -464.53,0.53 U3.17
MT6816_CS: U3.38 U8.1 | length 919.4
  Signal2 w10: v1(-346.21,-412) -346.21,-382.21 -310,-346 -216.6,-346 -141,-270.4 -141,-161 -108,-128 102,-128 127,-103 127,56 v1(108,75)
  Bottom4 w6: v1@-346.42,-411.79 v1(-346.21,-412)
  Bottom4 w10: v1@-346.42,-411.79 U3.38 ; U8.1 v1(108,75)
NetC1_2: C1.2 R1.2 R2.1 | length 143
  Bottom4 w10: R1.2 60,254 74,240 115,240 130,255 C1.2 R2.1
NetC4_2: C4.2 R6.2 R7.1 | length 145.4
  Bottom4 w10: R6.2 C4.2 -200,253 -187,240 -142,240 -130,252 R7.1
NetC9_2: C9.2 R10.1 U3.7 | length 374.2
  Signal2 w4: v1(-570,-370) -554,-354 -554,-309 -535,-290 -535,-213 v1(-557.84,-190.16)
  Bottom4 w4: R10.1 C9.2 -640,-365 -595,-365 -590,-370 -572.5,-370 v1(-570,-370) ; U3.7 v1(-557.84,-190.16)
NetC15_1: C15.1 C17.1 D3.2 L1.1 U6.6 | length 219
  Top1 w20: D3.2 219.54,-210 v1(224.54,-215) 218.54,-221 v1(198,-221)
  Bottom4 w20: C17.1 202.4,-267.4 U6.6 215.16,-220 C15.1
NetC15_2: C15.2 C17.2 U6.1 | length 166.5
  Bottom4 w20: U6.1 222.24,-327.24 C17.2 260,-345 270,-335 270,-290 C15.2
NetC16_2: C16.2 R13.1 R14.2 U6.3 | length 123.8
  Bottom4 w10: C16.2 R13.1 R14.2 127.6,-377.4 U6.3
NetC20_2: C20.2 D4.2 R15.1 U6.5 | length 407
  Top1 w20: D4.2 22.34,-182.66 42,-163 v1(158,-163) v1(180,-163) 188,-163 v1(199,-174)
  Bottom4 w10: R15.1 C20.2
  Bottom4 w20: U6.5 R15.1 165,-170 ; v1@200,-175 v1(199,-174) ; 165,-170 169,-174 v1(199,-174) ; 165,-170 v1(158,-163) v1(180,-163) 188,-163 v1(199,-174)
NetC23_2: C23.2 U7.4 | length 54.4
  Bottom4 w10: C23.2 -95,-232.46 U7.4
NetJ1_1: J1.1 R12.2 | length 50.8
  Top1 w4: v1(240,-575) 242,-573 J1.1
NetP1_4: P1.4 R11.2 U4.1 U4.2 | length 550.2
  Top1 w10: P1.4 -699.63,-79.37 -733,-46 -733,-7 -569,157 R11.2 U4.2@-411.54,157
NetR3_1: R3.1 U1.7 | length 792.8
  Top1 w30: v2(43,451) v2(43,421) v2(43,391) 43,377 70,350 168.67,350 193,374.33 v2(193,387) v2(193,417) v2(193,447)
  Bottom4 w20: v2(43,391) v2(43,421) v2(43,451) 43,465 69,491 123,491 145,513 U1.7@145,518 ; U1.7 U1.7@145,518 ; v2(193,387) v2(193,417) v2@193,445 ; v2(193,447) 214,447 R3.1@248.22,481.22 ; R3.1 R3.1@248.22,481.22 ; U1.7@145,518 181.78,481.22 R3.1@248.22,481.22
NetR8_1: R8.1 U2.7 | length 811.6
  Top1 w30: v2(-195,440) v2(-195,410) v2(-195,380) -195,367.33 -182.67,355 -60,355 -42,373 v2(-42,391) v2(-42,421) v2(-42,451)
  Bottom4 w20: v2(-195,380) v2(-195,410) v2(-195,440) -225,440 -260,475 R8.1 -181.78,481.22 -170,493 -113,493 -95,511 U2.7@-95,518 ; U2.7 U2.7@-95,518 ; v2(-42,391) v2(-42,421) v2(-42,451) -42,465 U2.7@-95,518
NetR9_1: R9.1 U3.44 | length 304
  Signal2 w4: v1(-585,-410) -574,-410 -535,-371 -535,-336 v1(-515,-316)
  Bottom4 w4: R9.1 -655,-389 -639,-405 -610,-405 -605,-410 -587.26,-410 v1(-585,-410) ; v1(-515,-316) -514,-315 -480,-315 -464.53,-330.47 U3.44
NetR15_2: R15.2 U6.4 | length 48.8
  Bottom4 w10: R15.2 125,-230.16 U6.4
NetU3_5: U3.5 Y1.3 | length 86.5
  Bottom4 w10: Y1.3 -654.4,-257.4 -626.53,-229.53 U3.5
NetU3_6: U3.6 Y1.1 | length 86.3
  Bottom4 w10: Y1.1 -656.4,-182.6 -629.16,-209.84 U3.6
OLED_DC: U3.29
OLED_RES: U3.30
OUT_A+: pad.@60,700 U1.6 | length 180.2
  Bottom4 w45: pad.@60,700 60,625 95,590 U1.6
OUT_A-: pad.@180,700 U1.8 | length 171.9
  Bottom4 w45: pad.@180,700 180,620 195,605 U1.8
OUT_B+: pad.@-180,700 U2.6 | length 180.2
  Bottom4 w45: pad.@-180,700 -180,620 -145,585 U2.6
OUT_B-: pad.@-60,700 U2.8 | length 171.9
  Bottom4 w45: pad.@-60,700 -60,590 -45,575 U2.8
PA10: U3.31
PC13: U3.2 | length 492.5
  Top1 w4: -745,-520 v1(-735,-520)
  Signal2 w4: v1(-735,-520) -641,-426 v1(-621,-426)
  Bottom4 w4: v1(-621,-426) -657,-426 -675,-408 -675,-340.16 -683.16,-332 -708,-332 -717,-323 -717,-297 -703,-283 -636,-283 -630.42,-288.58 U3.2
PC14: U3.3 | length 436.9
  Top1 w4: -749,-550 v1(-735,-550)
  Signal2 w4: v1(-735,-550) -755,-530 -755,-512 -713.66,-470.66 v1(-713.66,-457.34)
  Bottom4 w4: v1(-713.66,-457.34) -726,-445 -726,-294 -707,-275 -638,-275 -631.9,-268.9 U3.3
PC15: U3.4
POWER_U: C26.2 R16.2 R17.1 U3.10 | length 542.7
  Top1 w10: v1(-563,-131) -563,-148 -518,-193 v1(-225,-193)
  Bottom4 w10: U3.10 -563.1,-131.1 v1(-563,-131) ; v1(-225,-193) -187,-193 C26.2 R17.1 R16.2
SPI1_MISO: P4.2 U3.40 U8.6 | length 1556.5
  Signal2 w10: v1(-600,364) -574,338 -574,310 -636,248 -636,153.8 -733,56.8 -733,-51.2 -684.2,-100 -656,-100 -602,-154 -541,-154 -523,-172 -485,-172 -436,-221 -436,-278 -396,-318 v1(-386,-318) -372,-304 -234,-304 -183,-253 v1(-183,-42)
  Bottom4 w10: v1(-386,-318) -385.79,-318.21 U3.40 ; v1(-183,-42) -166,-25 U8.6
SPI1_MOSI: P4.3 U3.41 U8.5 | length 1483.8
  Signal2 w10: v1(-599,325) -650,274 -650,159.6 -747,62.6 -747,-57 -688,-116 -659.8,-116 -607.8,-168 -549,-168 -531,-186 -492,-186 -450,-228 -450,-291 v1(-405.47,-335.53) -380,-361 -355,-361 -326,-332 -222.4,-332 -155,-264.6 -155,-155.2 -131,-131.2 -131,-92 v1(-114,-75)
  Bottom4 w10: U3.41 v1(-405.47,-335.53) ; v1(-114,-75) U8.5
SPI1_SCK: P4.4 U3.39 U8.7 | length 1709.4
  Top1 w10: P4.4 -582.63,285.63 v1(-566,269)
  Signal2 w10: v1(-566,269) -585,269 -622,232 -622,148 -712,58 -712,4 -686,-22 -686,-38 -666,-58 -415.73,-58 -326.73,-147 -309,-147 -282,-120 -282,-48 -248,-14 -145,-14 ; v1(-366,-334) -364.06,-334 -348.06,-318 -228.2,-318 -169,-258.8 -169,-148.4 -145,-124.4 -145,-14 ; v1(-106,25) -145,-14
  Bottom4 w6: v1@-366.1,-334.1 v1(-366,-334)
  Bottom4 w10: U3.39 v1@-366.1,-334.1 ; v1(-106,25) U8.7
SPI2_MISO: U3.27
SPI2_MOSI: U3.28
SPI2_SCK: U3.26
SWCLK: P5.2 U3.37 | length 412.9
  Top1 w4: P5.2@-630,-340 -560,-340 -472,-428 -409,-428 v1(-397,-416)
  Bottom4 w4: v1(-397,-416) -371,-416 -355,-432 -336,-432 -326.73,-422.73 U3.37
SWDIO: P5.3 U3.34 | length 587
  Top1 w4: P5.3@-630,-379.37 -611.37,-379.37 -581,-349 -562.31,-349 -474.31,-437 v1(-377,-437)
  Bottom4 w4: v1(-377,-437) -366,-448 -327,-448 -298,-419 -298,-335 -311,-322 -311,-281 -298.9,-268.9 U3.34
TEMP: C3.2 R4.1 R5.2 U3.11 | length 1069.3
  Signal2 w6: v1(-666,-25) -647,-6 -647,56 -616,87 -538,87 -357,268 -213,268 -147,334 -65,334 0,399 v1(0,435)
  Bottom4 w4: C3.2 -637,-43 -637,-102 -627.58,-111.42 U3.11
  Bottom4 w10: R4.1 v1(0,435) R5.2
UART1_RX: P1.1 U3.43 | length 475.4
  Top1 w4: v1(-605,30) -585,10 -585,-3 -497,-91 -497,-128 v1(-514,-145)
  Bottom4 w4: v1(-514,-145) -514,-163 -487,-190 -487,-290.31 -444.84,-332.47 U3.43
UART1_TX: P1.2 U3.42 | length 461
  Top1 w4: P1.2 -601.37,-0.63 -519,-83 v1(-519,-111)
  Bottom4 w4: v1(-519,-111) -479,-151 -479,-287 -425.16,-340.84 U3.42
USB_DM: U3.32
USB_DP: U3.33
VCC: C11.2 C12.2 C13.2 C14.2 D1.2 D2.2 D4.1 R16.1 U1.5 U2.5 | length 1866.6
  Top1 w20: D2.2 -103.54,-210 D4.1
  Top1 w80: -326,-492 -257,-492 -153.54,-388.54 D2.2 -153.54,-170.46 -270,-54 -270,481 -230,521 v2(-225,521) v2(-195,521) v2(15,521) v2(45,521)
  Bottom4 w10: R16.1 -115,-295 v1(-115,-319)
  Bottom4 w25: U2.5@-195,555 v2@-225,555 ; v2(45,551) v2(15,551) ; v2@-225,555 -195,525 -225,525 v2(-225,551) v2@-225,555 ; v2(15,551) v2(45,521) v2(15,521) v2(15,551)
  other v2: -195,551
VCC_3V3: C6.2 C7.2 C8.2 C10.2 C21.2 C22.2 C24.2 C25.2 P4.6 R4.2 R10.2 R11.1 T2.0 U3.1 U3.9 U3.24 U3.36 U3.48 U5.3 U7.5 U8.2 U8.4 | length 5843.3
  Top1 w10: -784,-550 v1(-784,-535) -784,-520 ; R11.1 -549.89,206.89 P4.6 -625,126 -747,4 -747,-53 -695,-105 -695,-171 -674,-192 -620,-192 -602,-210 -520,-210 v1(-510,-220) ; v1(85,-511) 85,-535 104,-554 248,-554 v1(273,-529) 287,-529 v1@295,-521
  Signal2 w4: v1(-784,-535) -752,-567 -752,-658 -677,-733 -549,-733 -497,-681 -497,-233 v1(-510,-220) ; v1(0,370) 166,370 185,351 269,351 301,319 301,286 358,229 358,-80 346,-92 253,-92 v1(158,3)
  Signal2 w10: v1(-125,-458) v1(-108,-441) -82,-467 -28,-467 16,-511 v1(85,-511)
  Bottom4 w10: R10.2 -674,-294 -642,-294 -627.73,-308.27 U3.1 -620,-328.27 C6.2 -563.27,-345 U3.48 -543.27,-304.27 -525,-286 -525,-207 ; C7.2 -655,-133 -637.21,-150.79 U3.9 -546.79,-150.79 ; v1(-510,-220) -512,-220 -525,-207 ; U3.36 -270,-330 C8.2 -108,-345 ; U5.3 -142,-475 v1(-125,-458) v1(-108,-441) -108,-345 ; U7.5 2.4,-261.6 -33,-297 -60,-297 -108,-345 ; C24.2 55,-155 40,-140 -4,-140 -20,-156 C21.2 -155,-175 -206,-124 -206,-73 -244,-35 U3.24 -326.73,-95.73 -363,-132 -462,-132 -506,-88 -539,-88 -548,-97 -548,-110 -540,-118 -540,-144 -546.79,-150.79 ; C25.2 90,-117.99 104.33,-103.66 U8.4 143,-75 158,-60 v1(158,3) 136,25 U8.2 ; C10.2 268,-380 295,-407 v1(295,-523) 288,-530 272,-530 v1(273,-529) ; -546.79,-150.79 -525,-172.58 -525,-207
  Bottom4 w20: C21.2 C22.2 -20,-232.65 U7.5 ; C24.2 C25.2
VCC_5V: C16.1 C18.2 C19.2 L1.2 R13.2 T1.0 U7.1 U7.3 | length 1096.2
  Top1 w20: v1@2.4,-386.4 v1(2.4,-335.4) ; v1(285,-212) v1(285,-187) v1(285,-164) T1.0
  Signal2 w20: v1@2.4,-386.4 v1(2.4,-335.4) 2.4,-312.6 42,-273 261,-273 285,-249 v1(285,-212) v1(285,-187) v1(285,-164)
  Bottom4 w20: U7.3 -72.4,-345.4 -49,-322 -11,-322 ; v1(3,-387) v1(3,-362) 3,-336 7,-340 C16.1 ; v1(285,-212) v1(285,-187) v1(285,-164) ; -11,-322 15.8,-322 ; -11,-322 v1(2.4,-335.4) 15.8,-322 ; 15.8,-322 37.8,-300 C18.2 ; C16.1 R13.2 C19.2 C18.2 ; C16.1 C18.2
VCC_IN: D1.1 P2.1 P2.2 P2.SH1 P3.1 P3.2 P3.SH1 pad.@65,770 pad.@-65,-770 | length 3313.9
  Top1 w40: v2(-170,-690) -145.31,-714.68 P3.SH1
  Top1 w80: D1.1 -180,-680 v2(-170,-690) ; 222,638 320,638 430,528 v2(430,-670) v2(430,-700) v2(430,-730)
  Signal2 w70: v2(-170,-660) v2(-170,-690) v2(-170,-720) -170,-740 -3,-740 42,-695 v2@430,-695 ; v2(430,-730) v2(430,-700) v2@430,-695 ; v2(430,-670) v2@430,-695 ; v2@455,-695 v2@430,-695
  Bottom4 w70: -170,-740 -120,-740 ; v2(-170,-690) v2(-140,-720) -120,-740 ; v2(430,-730) v2(430,-700) v2@430,-695 ; v2(430,-670) v2@430,-695 ; v2@455,-695 v2@430,-695 ; -120,-740 -3,-740 42,-695 v2@430,-695
  other v2: 400,-730 460,-730 -200,-720 400,-700 460,-700 -200,-690 -140,-690 400,-670 460,-670 -200,-660 -140,-660
VREF_A: C2.2 R2.2 U1.4 | length 324.6
  Bottom4 w10: U1.4 45,344 68,367 160,367 165,362 209,362 230,341 C2.2 R2.2
VREF_B: C5.2 R7.2 U2.4 | length 276.8
  Bottom4 w10: U2.4 -195,335 -164,366 -78,366 -70,358 -70,290 R7.2 C5.2
pads on no net: U3.18 U3.19 U5.5 U5.8 U8.3

## Polygon pours and split planes (outlines as drawn)
GND on Top1 "GND_L01_P007" (solid, remove dead copper, pour order 7): 1110.24,1110.24 1110.24,-1110.24 -1110.24,-1110.24 -1110.24,1110.24
VCC_IN on Top1 "VCC_IN_L01_P001" (solid, remove dead copper, pour order 1): 45.67,599.33 50,595 230,595 250,615 250,715 165,800 45.67,800
VCC_IN on Top1 "VCC_IN_L01_P004" (solid, remove dead copper, pour order 4): -45,-595 -55,-585 -150,-585 -150,-770 -60,-770 -45,-755 -45,-650
VCC_IN on Top1 "VCC_IN_L01_P006" (solid, pour order 6): -220,-640 -140,-640 -124.19,-655.81 -124.19,-726.55 -131.04,-733.4 -208.96,-733.4 -220,-722.36 -220,-695
GND on Bottom4 "GND_L04_P005" (solid, remove dead copper, pour order 5): 1110.24,1110.24 1110.24,-1110.24 -1110.24,-1110.24 -1110.24,1110.24
VCC_IN on Bottom4 "VCC_IN_L04_P003" (solid, remove dead copper, pour order 3): -140,-640 -205,-640 -220,-655 -220,-722.36 -202.36,-740 -137.64,-740 -124.19,-726.55 -124.19,-655.81
GND on Gnd3 "GND_L03_P002" (solid, remove dead copper, pour order 2): 1110.24,1110.24 1110.24,-1110.24 -1110.24,-1110.24 -1110.24,1110.24
GND on Signal2 "GND_L02_P000" (solid, remove dead copper, pour order 0): 1110.24,1110.24 1110.24,-1110.24 -1110.24,-1110.24 -1110.24,1110.24

## Keep-outs
Keep-Out Layer:
  the board outline again, w10

## Other copper
Top1:
  pour cut-out: -90,100 -90,-100 90,-100 90,100
  text "Ctrl" at 706,-486 h100 r90
Signal2:
  pour cut-out: -90,100 -90,-100 90,-100 90,100
Gnd3:
  pour cut-out: -90,100 -90,-100 90,-100 90,100
Bottom4:
  pour cut-out: -90,100 -90,-100 90,-100 90,100

## Silkscreen, mask and mechanical layers (free items; w line width, h text height)
Top Overlay:
  lines w10: 9,-15 ccw(c64,5) 68.86,-53.32 ; 340,-581 ccw(c320,-526) 378.32,-521.14
  text "Gnd CAN_H CAN_L Vin" at -199,516.19 h40
  text "Enc-Aux" at -524.65,232.5 h60 r90
  text "Inside" at -102,131 h50 r90
  text "Designed by" at -318.1,89 h50 r90
  text "High Performance  / Step-Motor Driver" at -79.65,30 h70
  text "KEY2" at 647.7,13.64 h60 r90
  text "Pengzhihui" at -238.1,-91 h90 r90
  text "Algorithm" at -112,-94 h50 r90
  text "Ver 1.0" at -318.1,-96 h55 r90
  text "14bit" at 301,-99 h80
  text "Magnetic Encoder" at 86.31,-108 h50
  text "KEY1" at 647.37,-156.36 h60 r90
  text "[ Field-Oriented Control ]" at -168.95,-165.4 h40 r90
  text "5V" at 283.78,-178.25 h45
  text "ADC Comm" at -494,-217 h80 r90
  text "ADC 2V5 Gnd Tx Rx" at -433.86,-229.5 h40 r90
  text "Dbg" at -494,-450 h80 r90
  text "Gnd Clk Dio" at -433.51,-470 h40 r90
  text "CAN_EP" at 441.95,-571.89 h60 r90
  text "3V3" at 168.43,-589 h45
Bottom Overlay:
  text "B-" at -247.61,652.34 h80
  text "A-" at 482.39,651.84 h80
  text "B+" at -356.25,637.5 h80
  text "A+" at 373.75,637 h80
  text "Driver" at -320,585 h80 r90
  text "MT6816" at 132.5,135 h80
  text "STM32F103" at -260.87,25 h80
  text "-12MHz-" at -711.73,-124.56 h45 r90
  text "CAN-PHY" at -83.21,-393.99 h30
  text "Pwr & CAN" at 190,-715 h80
  text "Gnd CAN_H CAN_L Vin" at 200,-789.47 h40
Top Solder:
  rectangle: -125,-655 -60,-595
  region: 125,-595 60,-595 60,-655 125,-655
  region: 125,655 60,655 60,595 125,595
  rectangle: -125,595 -60,655
  region: 225,-730 225,-755 302,-755 302,-730
  region: -225,730 -225,755 -302,755 -302,730
  rectangle: 616.91,-485.83 705.91,-274.83
  rectangle: 70,380 170,480
  rectangle: -170,380 -70,480
  text "+" at 345,690 h200 r90
  text "v1.5" at 795,330 h60 r90
  text "max" at 735,275 h120 r90
  text "24V" at 655,170 h180 r90
  text "Step" at 788.91,-467.82 h80 r90
  text "+" at -345,-690 h200 r270
Bottom Solder:
  text "PENGZHIHUI.XYZ" at 603,380 h100 r90
Mechanical 1:
  the board outline again, w10